# Altium PCB PanelTSW.PcbDoc
Units mm, origin at the board's own origin, x right, y up, seen from the top; angles counter-clockwise.
Board outline 152.4 x 101.6 mm, 2 copper layers (Top Layer, Bottom Layer); 34 components, 28 nets, 105 pads, 3 vias.
Unrouted connection lines stored in the file: 63.
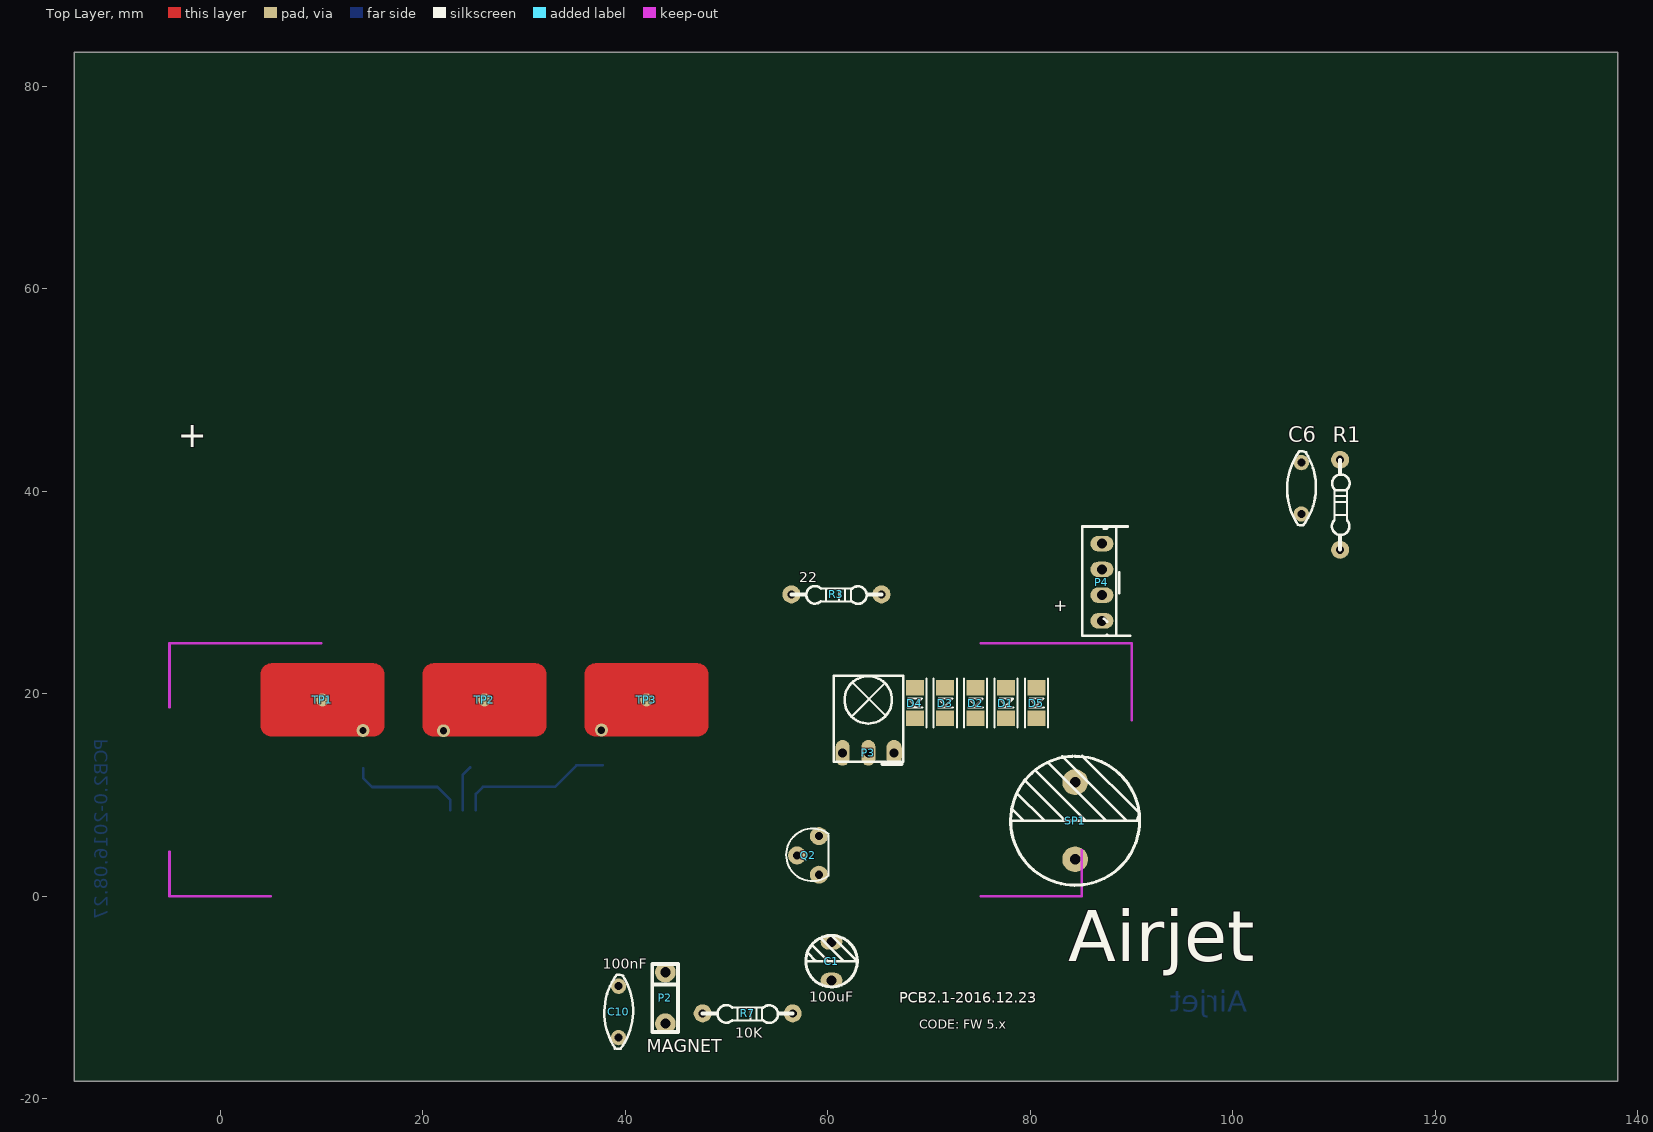
[diagram p0: Top Layer view]
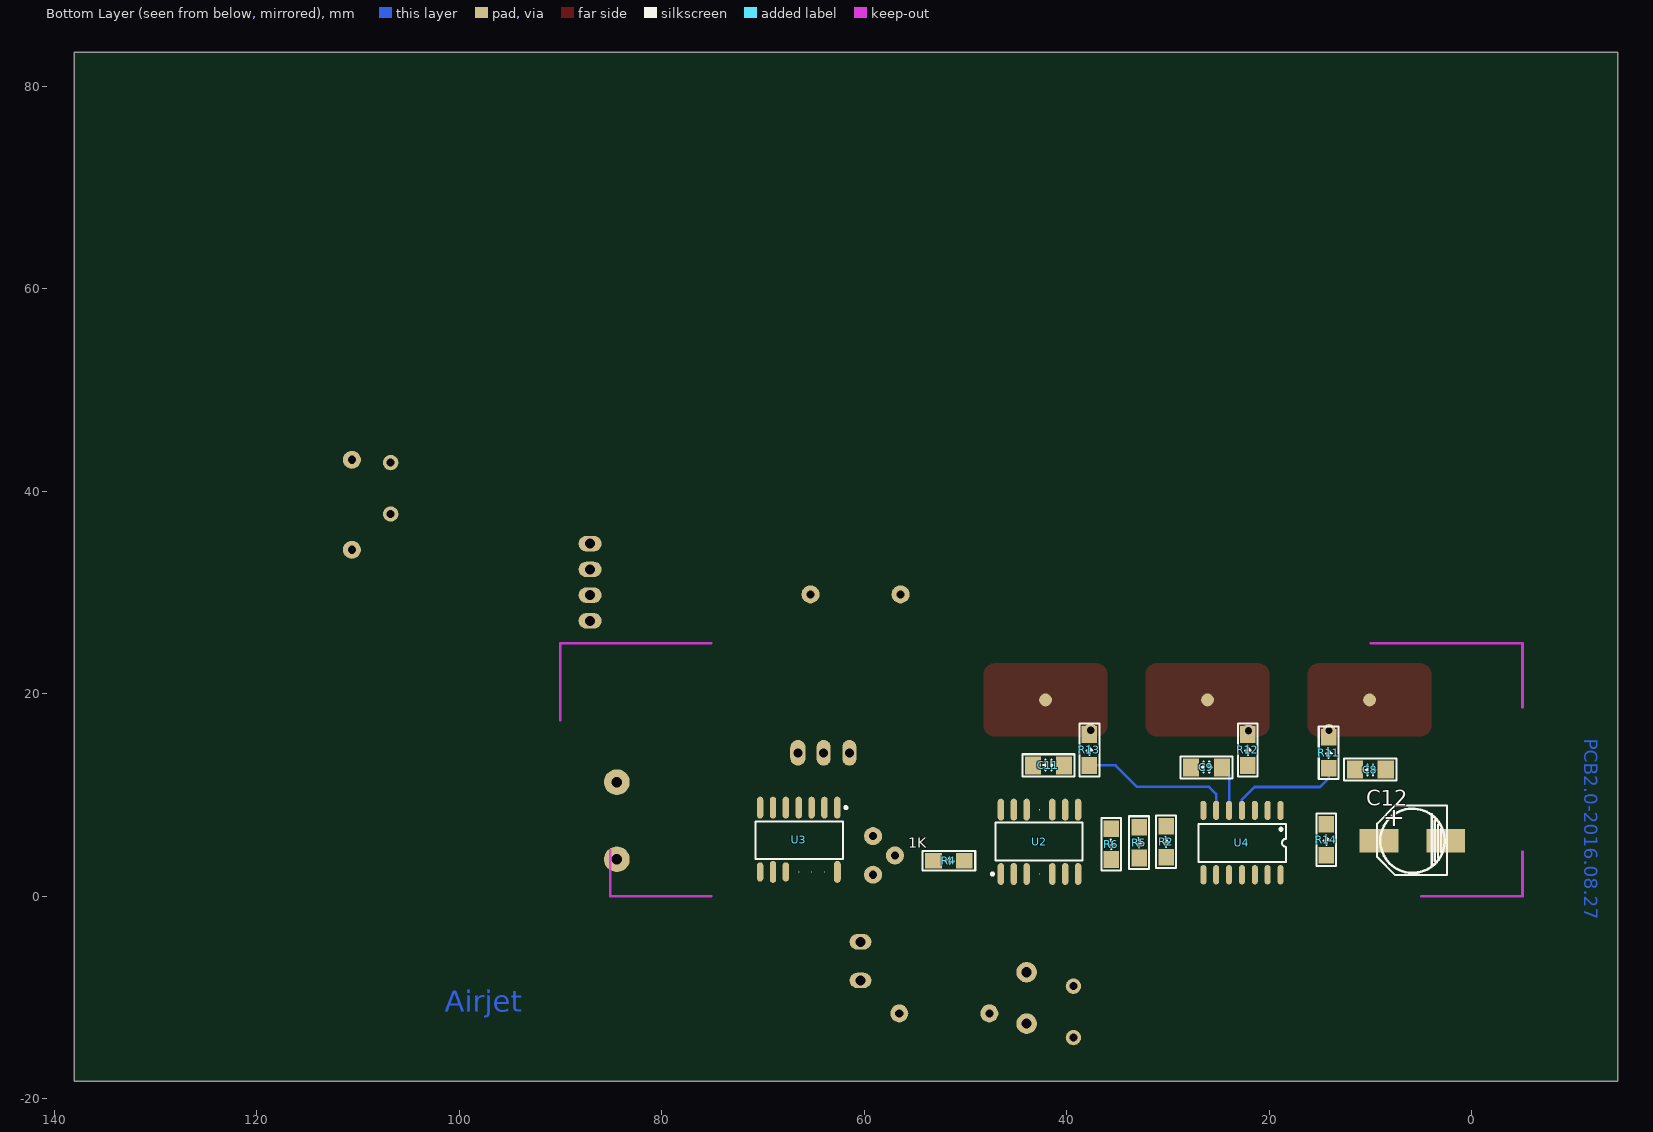
[diagram p1: Bottom Layer view, seen from below]

## Layer stack, top to bottom
Top Solder: solder mask 0.0102, Solder Resist, Dk 3.5
Top Layer: signal copper 0.0356
Dielectric1: dielectric 0.32, FR-4, Dk 4.8
Bottom Layer: signal copper 0.0356
Bottom Solder: solder mask 0.0102, Solder Resist, Dk 3.5

## Board outline
-14.397,-18.256 138.003,-18.256 138.003,83.344 -14.397,83.344

## Design rules (kind name [scope] priority, off if disabled: settings)
Clearance [All] p1: gap=0.254
FabricationTestPointUsage TestPointUsage [All] p1: valid=0 allowmultiple=FALSE
FabricationTestpoint Testpoint [All] p1: side=3 testpointundercomponent=TRUE minsize=1.016 maxsize=2.54 preferedsize=1.524 minholesize=0 maxholesize=1.016 preferedholesize=0.813 testpointgrid=0.025 allowsidetop=TRUE allowsidebottom=TRUE usegrid=TRUE gridtolerance=0
PolygonConnect [All] p1: connectstyle=Relief reliefconductorwidth=0.254 reliefentries=4 polygonreliefangle="90 Angle" airgapwidth=0.254
RoutingVias [All] p1: holewidth=0.711 width=1.27 viastyle="Through Hole" minholewidth=0.711 minwidth=1.27 maxholewidth=0.711 maxwidth=1.27
SolderMaskExpansion [All] p1: expansion=0.102
Width [All] p1: maxlimit=2.54 minlimit=0.254 preferedwidth=0.635 minimp=50.000000 maximp=50.000000 favimp=50.000000
27 further rules are at their usual default settings.

## Components (designator, comment, footprint, x,y, rotation, side; value= is the part's Value field where it differs from the comment)
C1 "100uF" RB.15/.2 60.376,-7.671 r90 top
C6 "100nF" RAD0.2 106.761,37.751 r90 top
C8 "10pF" 1206C 8.509,12.522 r0 bottom
C9 "10pF" 1206C 27.737,12.725 r180 bottom
C10 "100nF" RAD0.2 39.345,-13.945 r90 top
C11 "10pF" 1206C 43.332,12.929 r180 bottom
C12 "1uF" CapSMD2 9.169,5.486 r180 bottom
D1 "L1" 1206LED 77.6,19.089 r270 top locked
D2 "L2" 1206LED 74.6,19.089 r270 top locked
D3 "L3" 1206LED 71.6,19.089 r270 top locked
D4 "L4" 1206LED 68.6,19.089 r270 top locked
D5 "L5" 1206LED 80.6,19.089 r270 top locked
P2 "Magnet" Magnet 43.967,-7.493 r270 top
P3 "IrReceiver" IrRec1 64,19.4 r0 top locked
P4 "Header 4" CON4 87.071,34.823 r180 top
Q2 "2N3904" TO92BS2 58.496,4.039 r270 top
R1 "10" RES0.35 110.596,34.22 r90 top
R2 "10K" 1206R 30.201,3.861 r90 bottom
R3 "22" RES0.35 56.413,29.82 r0 top (schematic designator R1)
R4 "1K" 1206R 50.114,3.505 r0 bottom
R5 "10K" 1206R 32.868,3.785 r90 bottom
R6 "10K" 1206R 35.611,3.632 r90 bottom
R7 "10K" RES0.35 47.65,-11.557 r0 top
R11 "220" 1206R 14.148,12.649 r90 bottom
R12 "220" 1206R 22.123,12.929 r90 bottom
R13 "220" 1206R 37.77,12.929 r90 bottom
R14 "510K" 1206R 14.376,4.064 r90 bottom
SP1 "BUZZER" RB.3/.6 84.43,11.278 r90 top
TP1 "TPAD" TPAD14X7 10.1,19.4 r0 top
TP2 "TPAD" TPAD14X7 26.1,19.4 r0 top
TP3 "TPAD" TPAD14X7 42.1,19.4 r0 top
U2 "ATtiny24A-SSU" SOIC14#1 46.507,2.21 r90 bottom
U3 "MC74HC164AN" SOIC14#2 62.662,8.763 r270 bottom
U4 "TS04-SOC14" SOIC14#3 18.898,8.484 r270 bottom

## Footprints (in the part's own frame and the unit in brackets; to place one, negate y for a bottom-side part, rotate by r counter-clockwise, add the part's x,y. Pads: shape width x height; smd on the part's side, far side on the other; paste and mask are expansions set on the pad)
1206C [mm] "Chip Cap; Body 3.2 x 1.6 mm (LxW typ)"
  rect 1.6x1.8 smd: 1(0,0) 2(3.048,0)
  silkscreen extent -1.05,-1.1 4.1,1.1
1206LED [mil] "Chip Resistor; Body 3.2 x 1.6 mm (LxW typ)"
  rect 60x70 smd mask+4: 1(-60,0)
  rect 60x70 smd: 2(60,0)
  silkscreen extent -95,-45 95,45
1206R [mil] "Chip Resistor; Body 3.2 x 1.6 mm (LxW typ)"
  rect 65x60 smd mask+4: 1(0,0)
  rect 65x60 smd: 2(120,0)
  silkscreen extent -42,-38 162,38
CapSMD2 [mil] "Magnetic Transducer Buzzer"
  rect 150x90 smd: 1(0,0) 2(260,0)
  silkscreen extent -8,-134 264,138
CON4 [mil] "100mil between pins"
  oval 90x60 hole 39.37: 1(0,0) 2(0,100) 3(0,200) 4(0,300)
  silkscreen extent -110,-67 77,358
IrRec1 [mm] "38KHz Ir Receiver"
  oval 1.397x2.54 hole 0.9: 1(-2.531,-5.231) 2(0.009,-5.231)
  oval 1.524x2.54 hole 0.9: 3(2.549,-5.231)
  silkscreen extent -3.42,-6.32 3.44,2.39
Magnet [mil]
  round 80 hole 39.37: 1(0,0) 2(200,0)
  silkscreen extent -31,-51 232,49
RAD0.2 [mil]
  round 60 hole 31.5: 1(0,0) 2(200,0)
  silkscreen extent -44,-57 244,55
RB.3/.6 [mil]
  round 100 hole 40: 1(0,0) 2(-300,0)
  silkscreen extent -401,-251 102,251
RB.15/.2 [mil]
  oval 60x85 hole 39.37: 1(-25,0) 2(125,0)
  silkscreen extent -50,-100 150,100
RES0.35 [mil] "Diode, Axial; Body 5.2 x 2.7 mm (LxDia. max), Lead Dia. 0.86 mm (max)"
  round 70 hole 31.5: 1(0,0)
  round 70 hole 31.5 paste+0: 2(350,0)
  silkscreen extent 0,-37 350,32
SOIC14#1 [mil] "SOIC, 16-Leads, Body 9.9x3.9mm, Pitch 1.27mm, IPC High Density"
  oval 85x25 smd: 1(0,0) 2(0,-50) 3(0,-100) 5(0,-200) 6(0,-250) 7(0,-300) 8(250.04,-300) 9(250.04,-250) 10(250.04,-200) 12(250.04,-100) 13(250.04,-50) 14(250.04,0)
  round 5 smd: 4(0,-150) 11(250.04,-150)
  silkscreen extent -5,-318 200,38, body extent 16,-318 235,20, height 69
SOIC14#2 [mil] "SOIC, 16-Leads, Body 9.9x3.9mm, Pitch 1.27mm, IPC High Density"
  oval 85x25 smd: 1(0,0) 2(0,-50) 3(0,-100) 4(0,-150) 5(0,-200) 6(0,-250) 7(0,-300) 9(250.04,-250)
  oval 75x25 smd: 8(250.04,-300) 10(250.04,-200)
  round 5 smd: 11(250.04,-150) 12(250.04,-100) 13(250.04,-50)
  oval 85x27 smd: 14(250.04,0)
  silkscreen extent -5,-318 200,38, body extent 16,-318 235,20, height 69
SOIC14#3 [mil] "SOIC, 16-Leads, Body 9.9x3.9mm, Pitch 1.27mm, IPC High Density"
  oval 74.8x23.62 smd: 1(0,0) 2(0,-50) 3(0,-100) 4(0,-150) 5(0,-200) 6(0,-250) 7(0,-300) 8(250.04,-300) 9(250.04,-250) 10(250.04,-200) 11(250.04,-150) 12(250.04,-100) 13(250.04,-50) 14(250.04,0)
  silkscreen extent 53,-318 200,22, body extent 16,-318 235,20, height 69
TO92BS2 [mil] "NPN-CC5551,C945 Base Side"
  round 70 hole 31.5: 1(-75,25) 2(0,-60) 3(75,25)
  silkscreen extent -105,-102 100,63
TPAD14X7 [mm]
  round 1.27 all layers, no hole: 1(0,0)
  Top Layer region: -5,3.5 -5.441,3.465 -5.771,3.287 -6.025,2.754 -6,-2.834 -5.289,-3.545 5.379,-3.545 5.938,-2.986 5.938,2.83 5.303,3.465
  Top Layer lines w0.254: -6,-2.5 ccw(c-5,-2.5) -5,-3.5 5,-3.5 ccw(c5,-2.5) 6,-2.5 6,2.5 ccw(c5,2.5) 5,3.5 -5,3.5 ccw(c-5,2.5) -6,2.5 -6,-2.5

## Part data
C1 C12: library part "Cap Pol", "Polarized Capacitor"
C6 C8 C9 C11: library part Cap, "Capacitor"
C10: library part Cap, "Capacitor SMD"
D1 D2 D3 D4 D5: library part LED0.5, "LED Radial 0.5"
P2: library part "Header 2", "Header, 2-Pin"
P3: library part "Header 3", "3pin"
P4: "Header, 4-Pin"
Q2: library part BC337, "NPN General Purpose Amplifier"
R1 R2 R3 R4 R5 R6 R7 R11 R12 R13 R14: library part Resistor, "Resistor"
SP1: "5Volt"
TP1 TP2 TP3: library part PAD14x7, "Touch Pad"
U2: library part ATtiny24-16PC, "8-Bit AVR Microcontroller with 2K Bytes of Flash Memory"
U3: "8-Bit Serial Input / Parallel-Output Shift Register"
U4: library part TS04, "Touch swith"

## Via types
v1: diameter 1.27, hole 0.711, Top Layer to Bottom Layer, 3 vias

## Nets (pads, with @x,y where several pads share a name; then routed paths per layer and width w, separated by ;. In a path a pad name is that pad's centre, name@x,y a point inside that pad or via, vN(x,y) a via of type N, cw(c..) or ccw(c..) an arc to the next point about the centre after c; other vN are vias at no path point)
+5V: C12.1 P3.2 P4.1 R1.2 R2.1 R3.1 R5.1 R6.1 R7.2 SP1.1 U3.2 U3.9 U3.14 U4.2
BUZZER: R4.1 U2.3
CLK: U2.2 U3.8
DIMOUT: P4.3 U2.7
GND: C1.2 C6.1 C8.1 C9.1 C10.1 C11.1 C12.2 P2.2 P3.3 P4.2 Q2.3 R14.2 U2.14 U3.7 U4.1 U4.8 U4.12
IRSEN: P3.1 U2.13
KEY1: R2.2 U2.10 U4.10
KEY2: R5.2 U2.8 U4.11
KEY3: R6.2 U2.9 U4.13
MAGNET: C10.2 P2.1 R7.1 U2.5
NetC8_2: C8.2 R11.1 U4.4 | length 11.5
  Bottom Layer w0.254: R11.1 14.148,11.659 15.011,10.795 21.463,10.795 22.708,9.55 U4.4
NetC9_2: C9.2 R12.1 U4.5 | length 4.5
  Bottom Layer w0.254: U4.5 23.978,12.014 C9.2
NetC11_2: C11.2 R13.1 U4.6 | length 15.3
  Bottom Layer w0.254: U4.6 25.248,10.109 25.959,10.82 33.071,10.82 35.179,12.929 R13.1
NetD1_1: D1.1 D2.1 D3.1 D4.1 D5.1 R3.2
NetD1_2: D1.2 U3.3
NetD2_2: D2.2 U3.4
NetD3_2: D3.2 U3.5
NetD4_2: D4.2 U3.6
NetD5_2: D5.2 U3.10
NetQ2_1: Q2.1 R4.2
NetQ2_2: Q2.2 SP1.2
NetR14_1: R14.1 U4.3
PAD1: R11.2 TP1.1
  other v1: 14.097,16.383
PAD2: R12.2 TP2.1
  other v1: 22.047,16.358
PAD3: R13.2 TP3.1
  other v1: 37.643,16.408
SERDATA: U2.12 U3.1
VMIC: C1.1 C6.2 R1.1 U2.1
ZEROC: P4.4 U2.6
pads on no net: U2.4 U2.11 U3.11 U3.12 U3.13 U4.7 U4.9 U4.14

## Keep-outs
Keep-Out Layer:
  lines w0.254: -5,4.42 -5,0 5,0 ; -5,18.669 -5,25 10,25 ; 75.1,0 85.1,0 85.1,4.572 ; 75.1,25 90,25 90,17.399

## Other copper
Bottom Layer:
  text "PCB2.0-2016.08.27" at -10.643,15.57 h2.29 r90
  text "Airjet" at 101.448,-12.09 h3.56

## Silkscreen, mask and mechanical layers (free items; w line width, h text height)
Top Overlay:
  circle w0.254: c64,19.4 r2.337
  lines w0.203: 62.459,21.107 65.634,17.932 ; 62.509,17.907 65.684,21.082
  text "+" at -4.191,44.348 h2.54
  text "+" at 82.093,29.337 h2.03 r270
  text "Airjet" at 83.769,-8.103 h8.64
  text "PCB2.1-2016.12.23" at 67.056,-10.846 h1.78
  text "CODE: FW 5.x" at 69.012,-13.36 h1.52
  text "MAGNET" at 42.113,-15.418 h1.27

## Text inside footprints (layer, text, board x,y; h text height)
C12: Bottom Overlay "+" at 6.565,8.486 h1.91 r180